# Altium PCB OmniChargePD.PcbDoc (part 2 of 2)
Units mm, origin at the board's own origin, x right, y up, seen from the top; angles counter-clockwise.
Board outline 77.8 x 67.8 mm, 4 copper layers (Top Layer, Signal Layer 1, Signal Layer 2, Bottom Layer), stack 0.778 mm thick; 111 components, 84 nets, 383 pads, 288 vias.
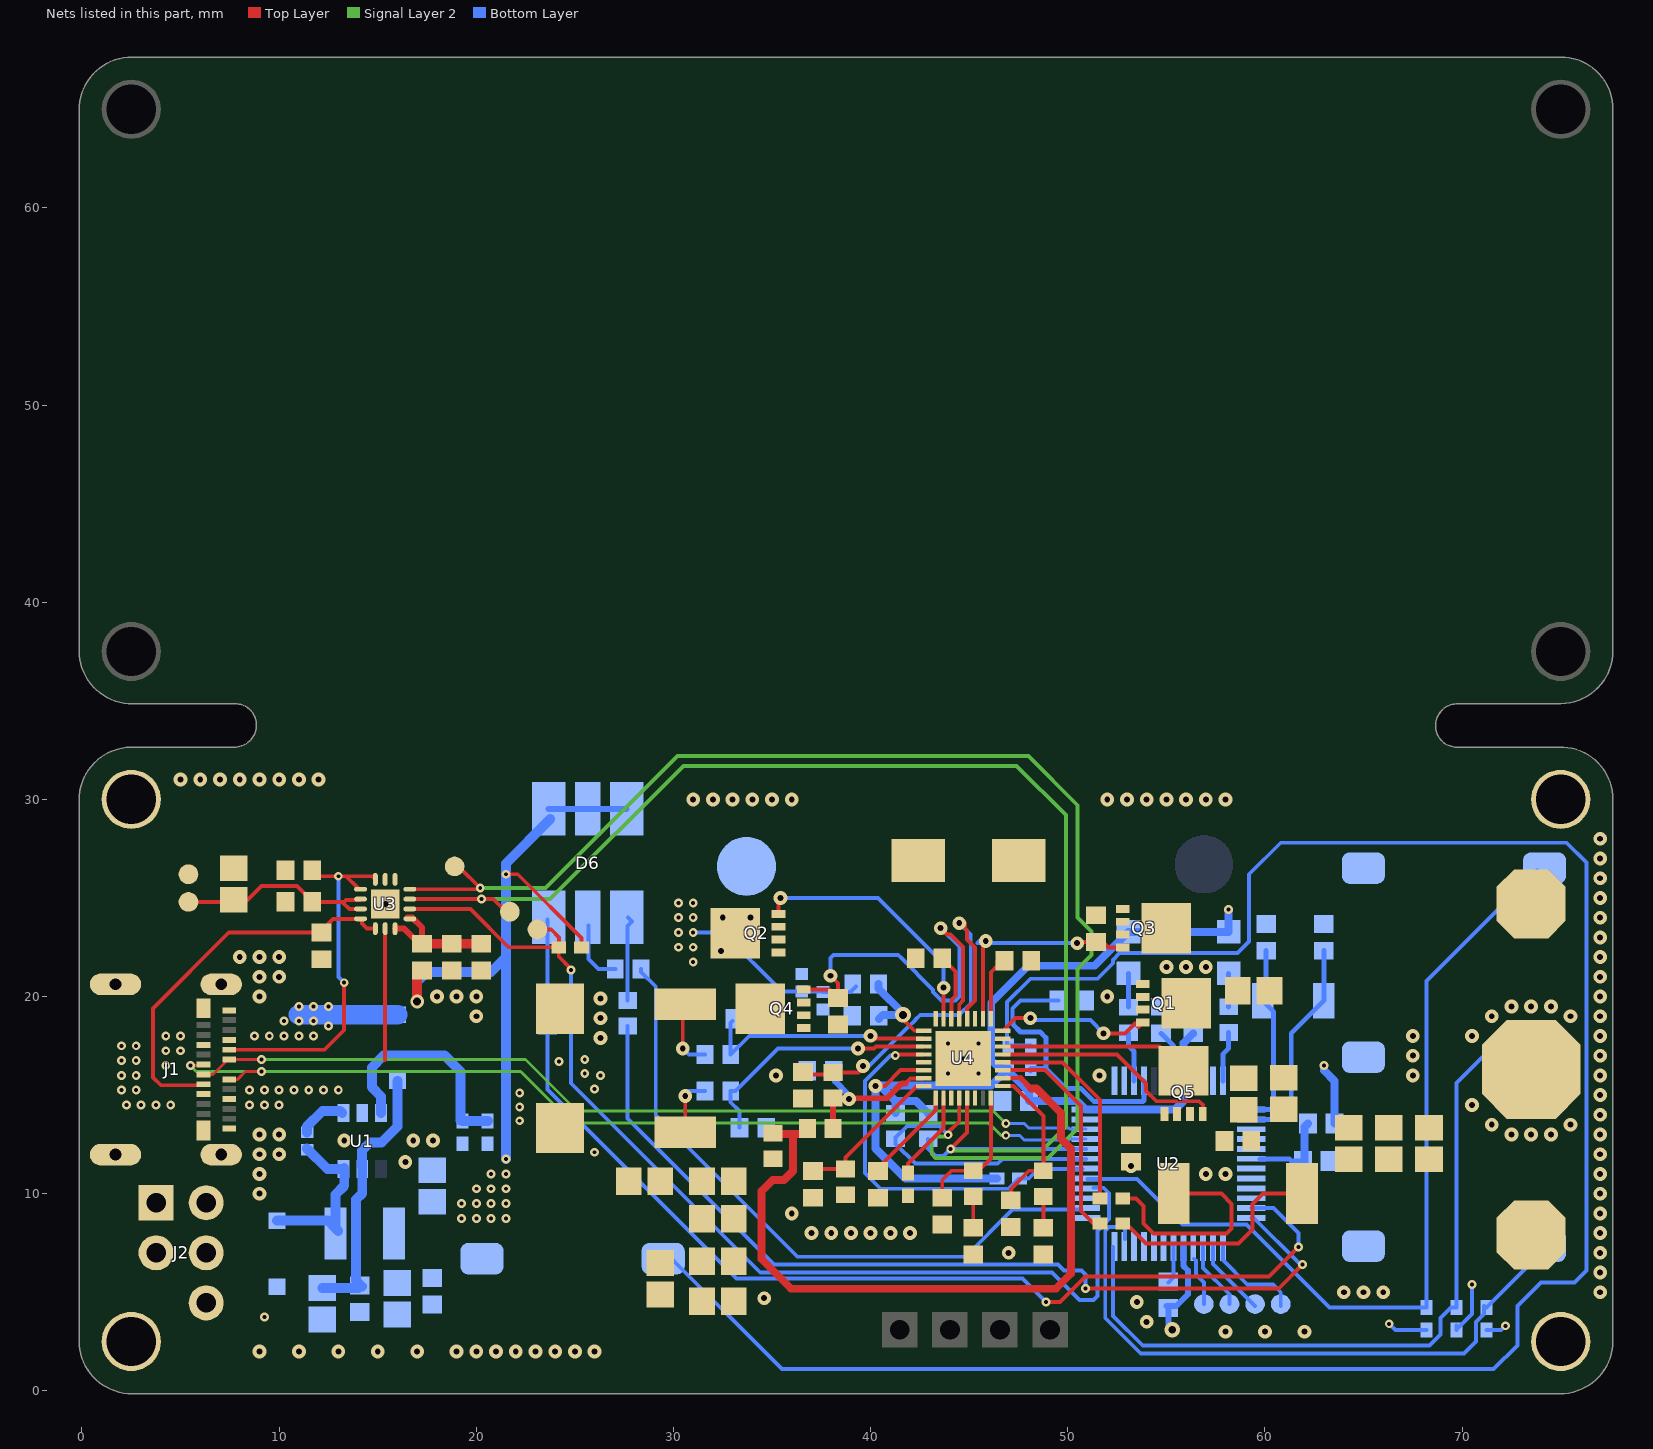
[diagram p4: the nets of this part, all layers, seen from the top]

## Via types
v1: diameter 0.45, hole 0.2, Top Layer to Bottom Layer, 138 vias
v2: diameter 0.7, hole 0.3, Top Layer to Bottom Layer, tented both sides, 123 vias
v3: diameter 0.7, hole 0.3, Top Layer to Bottom Layer, 19 vias
v4: diameter 0.45, hole 0.2, Top Layer to Bottom Layer, tented both sides, 5 vias
v5: diameter 0.8, hole 0.4, Top Layer to Bottom Layer, 2 vias
v6: diameter 0.7, hole 0.4, Top Layer to Bottom Layer, 1 vias

## Nets (pads, with @x,y where several pads share a name; then routed paths per layer and width w, separated by ;. In a path a pad name is that pad's centre, name@x,y a point inside that pad or via, vN(x,y) a via of type N, cw(c..) or ccw(c..) an arc to the next point about the centre after c; other vN are vias at no path point)
BATT: C44.1 C45.1 C46.2 C47.2 pad.@73.5,7.9 R21.1 R22.2 | length 11.3
  Top Layer w0.2: R22.2@52.787,8.481 52.95,8.481 53.966,7.465 58.666,7.465 59.377,8.176 59.377,9.487 59.895,10.005 R21.1@61.877,10.005
CHRG_OK: R7.2 U2.30 U4.4 | length 19.9
  Top Layer w0.2: v1(41.25,17) 41.313,17.063 U4.4@42.69,17.063
  Bottom Layer w0.2: v1(41.25,17) 41,17 39.711,15.711 39.711,11.039 40.5,10.25 47,10.25 R7.2@47.5,10.75 ; R7.2@47.556,10.77 48.02,10.77 48.5,11.25 U2.30@50.75,11.25
COMP1: C49.2 R25.2 U4.16 | length 6.9
  Top Layer w0.2: C49.2@43.632,9.791 43.632,10.695 44.1,11.163 R25.2@45.203,11.163 45.472,11.163 46.095,11.786 U4.16@46.095,14.858
COMP2: C50.2 R26.2 U4.17 | length 8.1
  Top Layer w0.2: U4.17@46.7,15.463 47.238,15.463 48.759,13.942 R26.2@48.759,11.163 48.032,11.163 47.108,10.239 C50.2@47.108,9.664
GND: C2.2 C3.1 C4.1 C5.2 C6.1 C7.1 C8.2 C9.2 C10.1 C11.1 C12.1 C13.1 C14.1 C15.1 C16.1 C17.1 C18.1 C19.1 C20.1 C22.2 C24.2 C25.2 C26.1 C27.1 C28.1 C29.1 C30.1 C31.1 C35.1 C36.1 C37.1 C38.1 C39.1 C40.1 C41.1 C42.1 C43.2 C45.2 C46.1 C47.1 C48.2 C49.1 C50.1 C51.1 C52.1 C53.1 C54.1 C55.1 D3.2 DN.1 J1.A1 J1.A12 J1.B1 J1.B12 J1.S1 J1.S2 J1.S3 J1.S4 J2.2 J2.4 J2.6 OK.1 pad.@2.5,2.5 pad.@2.5,30 pad.@5.4,26.2 pad.@33.7,26.6 pad.@73.5,16.3 pad.@75,2.5 pad.@75,30 Q3.1 Q3.2 Q3.3 Q4.1 Q4.2 Q4.3 R2.1 R27.1 R28.1 R29.1 RESET.1 U1.2 U2.5 U2.18 U2.35 U2.42 U3.8 U3.9 U3.15 U4.5 U4.14 U4.27 U4.33 UP.1 | length 1.9
  Bottom Layer w0.2: C13.1@55.1,5.5 55.363,5.763 U2.18@55.363,7.32
  other v2: 9,2 11,2 13,2 15,2 17,2 19,2 20,2 21,2 22,2 23,2 24,2 25,2 26,2 58,3 60,3 62,3 54,3.5 53.5,4.5 34.6,4.7 64,5 65,5 66,5 77,5 77,6 47,7 77,7 37,8 38,8 39,8 40,8 41,8 42,8 77,8 36,9 77,9 9,10 77,10 9,11 57,11 58,11 77,11 53.2,11.4 16.4,11.6 9,12 10,12 77,12 13.3,12.7 16.8,12.7 17.8,12.7 9,13 10,13 72.5,13 73.5,13 74.5,13 77,13 71.5,13.5 75.5,13.5 77,14 70.5,14.5 77,15 35.2,16 51.6,16 67.5,16 77,16 67.5,17 77,17 26.3,17.9 67.5,18 70.5,18 77,18 26.3,18.9 20,19 71.5,19 75.5,19 77,19 72.5,19.5 73.5,19.5 74.5,19.5 26.3,19.9 9,20 18,20 19,20 20,20 52,20 77,20 9,21 10,21 77,21 55,21.5 56,21.5 57,21.5 8,22 9,22 10,22 77,22 77,23 77,24 15.4,24.7 77,25 77,26 77,27 77,28 31,30 32,30 33,30 34,30 35,30 36,30 52,30 53,30 54,30 55,30 56,30 57,30 58,30 5,31 6,31 7,31 8,31 9,31 10,31 11,31 12,31
  other v4: 43.933,16.101 45.472,16.101 44.695,16.863 43.933,17.625 45.472,17.625
MISO_PD_INT: R30.1 TP3.1 U2.28 U3.5 | length 54.9
  Top Layer w0.2: U3.5@16.628,24.442 19.7,24.442 21.642,22.5 R30.1@24,22.5 ; TP3.1@23.1,23.4 23.8,23.4 24.2,23 R30.1@24.2,22.4 ; R30.1@24.181,22.492 24.181,22.019 24.8,21.4 v1(24.8,21.344)
  Bottom Layer w0.2: v1(24.8,21.344) 24.8,15.6 34.4,6 49.2,6 50.6,4.6 51.3,4.6 51.5,4.8 51.5,8.109 52.1,8.709 52.1,10 51.8,10.3 U2.28@51.3,10.3
MOSI: U2.25
NetC8_1: C8.1 U2.1 Y1.P$1 | length 9.4
  Bottom Layer w0.25: U2.1@59.313,14.27 60.263,14.27 60.443,14.45 60.443,19.224 Y1.P$1@59.883,19.784 60.062,19.963 C8.1@60.062,22.324
NetC9_1: C9.1 U2.2 Y1.P$2 | length 10.9
  Bottom Layer w0.25: U2.2@59.313,13.77 60.779,13.77 61.332,14.323 61.332,18.133 Y1.P$2@62.983,19.784 C9.1@62.983,22.324
NetC10_2: C10.2 U2.43 | length 2.7
  Bottom Layer w0.25: C10.2@54.728,18.133 55.363,17.498 U2.43@55.363,15.72
NetC14_2: C14.2 C15.2 FB2.2 U3.3 U3.4 | length 6.3
  Top Layer w0.3: U3.3@15.878,23.442 16.342,23.442 17.084,22.7 FB2.2@17.1,22.7 ; U3.4@16.5,24 16.75,24 17.25,23.5 FB2.2@17.25,22.675
  Top Layer w0.5: FB2.2@17.25,22.675 C15.2@18.75,22.675 C14.2@20.25,22.675
NetC20_2: C20.2 FB1.2 U2.6 | length 4.4
  Bottom Layer w0.25: U2.6@59.75,11.75 61.25,11.75 61.344,11.656 C20.2@61.927,11.656
  Bottom Layer w0.4: C20.2@62,11.5 62,13.38 FB1.2@62.181,13.561
NetC33_1: C33.1 U4.30 | length 3.4
  Top Layer w0.2: C33.1@43.632,21.943 44.314,21.261 44.314,20.038 44.095,19.819 U4.30@44.095,18.868
NetC33_2: C33.2 L2.1 Q2.1 Q2.2 Q2.3 Q4.5 U4.32
NetC34_1: C34.1 U4.25 | length 3.1
  Top Layer w0.2: U4.25@46.095,18.868 46.095,21.232 46.433,21.57 C34.1@46.433,21.816
NetC34_2: C34.2 L2.2 Q1.1 Q1.2 Q1.3 Q3.5 U4.23
NetC35_2: C35.2 Q4.4 U4.29 | length 20.9
  Top Layer w0.2: Q4.4@36.603,20.35 37.922,20.35 C35.2@38.345,19.927 38.345,20.673 v3(37.964,21.054) ; v3(43.552,23.467) 43.877,23.142 44.06,23.142 44.695,22.507 44.695,19.804 44.495,19.604 U4.29@44.495,18.868
  Bottom Layer w0.2: v3(37.964,21.054) 37.964,21.943 38.121,22.1 41.4,22.1 41.4,22.114 41.557,21.957 41.557,21.943 43.165,20.335 43.165,20.225 43.591,19.799 44.314,19.799 44.495,19.98 44.495,22.524 v3(43.552,23.467)
NetC36_2: C36.2 Q3.4 U4.26 | length 12
  Top Layer w0.2: U4.26@45.695,18.868 45.695,22.677 v3(45.838,22.82) ; v3(50.475,22.705) 50.537,22.767 C36.2@51.426,22.767 51.786,22.767 52.061,22.492 Q3.4@52.787,22.492
  Bottom Layer w0.2: v3(45.838,22.82) 45.525,22.82 45.41,22.705 v3(50.475,22.705)
NetC37_2: C37.2 C44.2 Q5.1 Q5.2 Q5.3 R20.2 R21.2 | length 11.3
  Top Layer w0.2: R20.2@52.787,9.751 53.458,9.751 53.839,9.37 53.839,8.481 54.347,7.973 58.051,7.973 58.305,8.227 58.305,9.487 57.787,10.005 R21.2@55.377,10.005
NetC38_2: C38.2 R17.1 U4.3 | length 12.8
  Top Layer w0.2: v3(39.361,17.371) 40.177,17.371 40.269,17.463 U4.3@42.69,17.463
  Bottom Layer w0.2: C38.2@33.352,13.345 33.352,14.183 32.899,14.636 R17.1@32.899,15.212 33.138,15.212 35.297,17.371 v3(39.361,17.371)
NetC39_2: C39.2 R18.1 U4.2 | length 12
  Top Layer w0.2: v3(39.996,18.006) 40.139,17.863 U4.2@42.69,17.863
  Bottom Layer w0.2: C39.2@33,18.75 32.899,18.649 R18.1@32.899,17.063 33.842,18.006 v3(39.996,18.006)
NetC43_1: C43.1 R19.2 U4.1 | length 5.2
  Top Layer w0.2: v5(41.647,19.07) 41.41,19.07 42.217,18.263 U4.1@42.69,18.263
  Bottom Layer w0.4: R19.2@40.392,20.632 40.392,20.404 41.647,19.149 v5(41.647,19.07) 40.619,19.07 C43.1@40.417,18.868
NetC51_2: C51.2 R24.1 U4.28 | length 19.9
  Top Layer w0.2: C51.2@36.567,16.177 36.701,16.043 R24.1@38.091,16.043 ; R24.1@38.091,16.152 39.379,16.152 39.615,16.388 v3(39.615,16.482) ; v3(44.495,23.721) 44.797,23.721 44.797,23.442 44.895,23.344 44.895,22.886 45.295,22.486 45.295,19.789 44.895,19.389 U4.28@44.895,18.868
  Bottom Layer w0.2: v3(39.615,16.482) 39.927,16.482 41.888,18.443 41.907,18.443 42.274,18.81 42.274,18.829 42.515,19.07 44.489,19.07 45.076,19.657 45.076,23.14 v3(44.495,23.721)
NetC52_2: C52.2 R25.1 | length 1.6
  Top Layer w0.2: C52.2@45.203,8.267 R25.1@45.203,9.863
NetC53_2: C53.2 R26.1 | length 1.6
  Top Layer w0.2: C53.2@48.759,8.267 R26.1@48.759,9.863
NetC54_2: C54.2 R28.2 U4.8 | length 7.7
  Top Layer w0.2: C54.2@37.075,11.148 37.177,11.25 R28.2@38.726,11.25 38.726,11.842 42.347,15.463 U4.8@42.69,15.463
NetC55_2: C55.2 U4.9 | length 4.9
  Top Layer w0.2: C55.2@40.377,11.148 40.377,11.295 43.295,14.213 U4.9@43.295,14.858
NetD4_2: D4.2 R5.1 | length 1.7
  Bottom Layer w0.25: R5.1@58.157,19.479 D4.2@58.157,21.181
NetD5_2: D5.2 R6.1 | length 1.7
  Bottom Layer w0.25: R6.1@53.077,19.46 D5.2@53.077,21.181
NetD6_1: D6.1 R10.1 | length 4.4
  Bottom Layer w0.2: R10.1@27.677,19.799 27.677,23.577 27.9,23.8 D6.1@27.7,24
NetD6_2: D6.2 R9.1 | length 3.3
  Bottom Layer w0.2: D6.2@25.7,23.6 25.7,21.9 26.2,21.4 R9.1@27.05,21.4
NetD6_3: D6.3 R8.1 | length 4.1
  Bottom Layer w0.2: D6.3@23.6,23.9 23.613,23.887 R8.1@23.613,19.799
NetJ3_2: R3.2 R4.2 RESET.2 | length 111
  Bottom Layer w0.2: RESET.2@30,6.6 35.5,1.1 71.6,1.1 72.8,2.3 72.8,4.3 74,5.5 75.7,5.5 76.3,6.1 76.3,26.8 75.3,27.8 60.8,27.8 59.2,26.2 59.2,22.8 58.6,22.2 52.629,22.2 52.288,21.859 52.288,21.688 51.5,20.9 48.1,20.9 46.911,19.711 46.911,17.575 R4.2@46.981,17.505 ; R4.2@47.1,17.5 47.105,17.505 R3.2@48.124,17.505
NetQ1_4: Q1.4 U4.24 | length 8.1
  Top Layer w0.2: U4.24@46.7,18.263 47.337,18.9 v3(48.1,18.9) ; v3(51.807,18.133) 52.9,18.133 53.408,18.641 53.585,18.464 Q1.4@53.803,18.682
  Bottom Layer w0.2: v3(48.1,18.9) 48.1,18.856 48.156,18.8 51.14,18.8 v3(51.807,18.133)
NetQ2_4: Q2.4 U4.31 | length 13.3
  Top Layer w0.2: Q2.4@35.323,24.188 35.323,24.89 v3(35.424,24.991) ; U4.31@43.695,18.868 43.695,19.665 43.704,19.657 v3(43.704,20.448)
  Bottom Layer w0.2: v3(35.424,24.991) 40.377,24.991 43.704,21.664 v3(43.704,20.448)
NetQ5_4: Q5.4 U4.21 | length 11.9
  Top Layer w0.2: U4.21@46.7,17.063 52.496,17.063 53.966,15.593 53.966,15.212 54.49,14.688 56.649,14.688 56.846,14.491 Q5.4@56.846,14.043
NetR23_1: R23.1 R27.2 U4.18 | length 37.9
  Top Layer w0.2: U4.18@46.7,15.863 47.6,15.863
  Top Layer w0.3: 47.6,15.863 48.124,15.339
  Top Layer w0.4: R27.2@35.043,13.068 35.076,13.035 36.059,13.035 ; R23.1@36.791,13.307 36.519,13.035 36.059,13.035 ; 48.124,15.339 48.414,15.339 49.648,14.105 49.648,12.799 50.156,12.291 50.156,5.941 49.394,5.179 35.97,5.179 34.472,6.677 34.472,10.132 35.034,10.695 35.606,10.695 36.059,11.148 36.059,13.035
NetR29_2: R29.2 U4.10 | length 4.6
  Top Layer w0.2: R29.2@41.901,11.048 41.901,11.54 43.695,13.334 U4.10@43.695,14.858
P\R\O\C\H\O\T\: U4.11
PA02: U2.3
PA03: U2.4
PA04: U2.9
PA05: U2.10
PA06: R8.2 U2.11 | length 50.5
  Top Layer w0.2: v1(48.9,4.5) 49.6,4.5 50.9,5.8 60.2,5.8 v1(61.7,7.3)
  Bottom Layer w0.2: R8.2@23.613,18.499 23.613,15.287 33.2,5.7 47.7,5.7 v1(48.9,4.5) ; U2.11@59.313,9.27 60.43,9.27 61.7,8 v1(61.7,7.3)
PA07: R10.2 U2.12 | length 46.9
  Top Layer w0.2: v1(50.9,5.2) 60.7,5.2 v1(61.9,6.4)
  Bottom Layer w0.2: R10.2@27.677,18.499 27.677,13.823 35.1,6.4 49.5,6.4 49.8,6.1 50.7,6.1 50.9,5.9 v1(50.9,5.2) ; U2.12@59.313,8.77 59.43,8.77 61.8,6.4 v1(61.9,6.4)
PA12: U2.21
PA13: U2.22
PA14: R13.2 U2.23 UP.2 | length 32
  Bottom Layer w0.2: U2.23@52.9,7.7 52.9,8.2 52.8,8.3 52.1,8.3 51.9,8.1 51.9,3.7 53.7,1.9 70.1,1.9 70.7,2.5 70.7,3.491 71.1,3.891 R13.2@71.1,4.3 ; R13.2@71.238,4.23 74.2,7.192 UP.2@74.2,7.2
PA15: OK.2 R14.2 U2.24 | length 39
  Bottom Layer w0.2: U2.24@52.3,7.3 52.3,3.8 53.8,2.3 68.352,2.3 68.9,2.848 68.9,3.7 69.43,4.23 R14.2@69.714,4.23 69.714,15.614 71,16.9 73.7,16.9 OK.2@73.9,16.7
PA20: DN.2 R15.2 U2.29 | length 44.4
  Bottom Layer w0.2: U2.29@51,10.75 53.5,10.75 55.819,8.431 59.069,8.431 63.27,4.23 R15.2@68.19,4.23 68.19,20.79 DN.2@73.8,26.4
PA27: R6.2 U2.39 | length 2.6
  Bottom Layer w0.25: R6.2@53.077,18.16 53.077,17.498 53.363,17.212 U2.39@53.363,15.72
PB02: U2.47
PB03: R5.2 U2.48 | length 2.6
  Bottom Layer w0.25: U2.48@57.863,15.72 57.863,17.077 58.157,17.371 R5.2@58.157,18.179
PB08: U2.7
PB09: U2.8
PB10: U2.19
PB11: U2.20
PB22: U2.37
PB23: U2.38
RESET: C7.2 R3.1 U2.40 | length 14.6
  Bottom Layer w0.2: 47.2,18.7 47.2,19.4 47.6,19.8 C7.2@49.525,19.8 ; R3.1@48.1,16.2 R3.1@48.255,16.355
  Bottom Layer w0.25: 47.225,18.8 47.225,18.575 47.6,18.2 48.6,18.2 48.886,17.914 48.886,16.355 ; R3.1@48.124,16.355 48.255,16.355 48.886,16.355 ; U2.40@53.863,15.72 53.863,14.728 53.819,14.684 51.319,14.684 50.664,15.339 49.902,15.339 48.886,16.355
SCL: R11.1 TP2.1 U2.32 U3.6 U4.13 | length 72.6
  Top Layer w0.2: U3.6@16.628,24.942 v1(20.258,24.942) 20.858,24.942 TP2.1@21.6,24.2 ; v1(44.06,12.27) 44.895,13.105 U4.13@44.895,14.858
  Signal Layer 2 w0.2: v1(20.258,24.942) 23.742,24.942 30.5,31.7 47.4,31.7 49.9,29.2 49.9,13.4 48.7,12.2 v1@44.1,12.2
  Bottom Layer w0.2: R11.1@42.917,12.782 42.917,12.291 43.298,11.91 43.7,11.91 v1(44.06,12.27) U2.32@50.913,12.27
SDA: R12.1 TP1.1 U2.31 U3.7 U4.12 | length 81.8
  Top Layer w0.2: U3.7@16.628,25.442 20.058,25.442 20.116,25.5 v1(20.2,25.5) ; TP1.1@18.9,26.6 19.1,26.6 v1(20.2,25.5) ; v1(43.933,12.987) 43.877,13.043 44.495,13.661 U4.12@44.495,14.858
  Signal Layer 2 w0.2: v1(20.2,25.5) 21.385,25.5 23.5,25.5 30.2,32.2 48,32.2 50.5,29.7 50.5,24 51.2,23.3 51.2,22.1 50.5,21.4 50.5,13.3 49,11.8 43.3,11.8 43.1,12 43.1,12.7 43.3,12.9 v1@43.8,12.9
  Bottom Layer w0.2: v1(43.933,12.987) 43.486,13.434 41.855,13.434 41.266,12.845 R12.1@41.266,12.784 41.266,12.53 42.267,11.529 46.446,11.529 46.687,11.77 U2.31@50.913,11.77
SPCK: R9.2 U2.26 | length 33.3
  Bottom Layer w0.2: R9.2@28.35,21.4 28.35,21.25 29.1,20.5 29.1,14 36.3,6.8 44.8,6.8 47.2,9.2 U2.26@50.7,9.2
SRN: R22.1 U4.19 | length 11.3
  Top Layer w0.2: U4.19@46.7,16.263 48.851,16.263 50.664,14.45 50.664,9.116 51.299,8.481 R22.1@51.637,8.481
SRP: R20.1 U4.20 | length 10.7
  Top Layer w0.2: U4.20@46.7,16.663 49.737,16.663 51.637,14.763 R20.1@51.637,9.751
SS: U2.27
UART_CTS: pad.@56.9,4.4 U2.16 | length 2.5
  Bottom Layer w0.2: U2.16@56.4,6.7 56.5,6.6 56.5,5.9 56.9,5.5 pad.@56.9,4.4
UART_FROM_MCU: pad.@60.8,4.4 U2.13 | length 5
  Bottom Layer w0.2: U2.13@57.863,7.32 57.863,6.637 59.1,5.4 60.4,5.4 60.8,5 pad.@60.8,4.4 pad.@60.8,4.3
UART_RTS: pad.@58.2,4.4 U2.15 | length 3.5
  Bottom Layer w0.2: U2.15@56.863,7.32 56.863,6.237 58.2,4.9 pad.@58.2,4.4
UART_TO_MCU: pad.@59.5,4.4 U2.14 | length 3.9
  Bottom Layer w0.2: U2.14@57.363,7.32 57.363,6.437 pad.@59.5,4.3
USB_N: J1.A7 J1.B7 U2.33 | length 49.5
  Top Layer w0.15: v1(5.5,16.5) 6.12,16.5 J1.B7@6.17,16.55 ; J1.A7@7.5,15.8 7.7,15.8 7.895,15.8 8.295,16.2 v1(9.1,16.2)
  Signal Layer 2 w0.15: v1(5.5,16.5) 5.8,16.2 v1(9.1,16.2) 9.4,16.2 22.251,16.2 24.855,13.596 45.97,13.596 46.605,12.961 v1(46.854,12.961)
  Bottom Layer w0.15: v1(46.854,12.961) 47.547,12.961 47.788,12.72 50.063,12.72 50.113,12.77 U2.33@50.913,12.77
USB_P: J1.A6 J1.B6 U2.34 | length 46.5
  Top Layer w0.15: J1.B6@6.17,16.05 6.65,16.05 7.4,16.8 J1.A6@7.47,16.8 v1(9.1,16.8)
  Signal Layer 2 w0.15: v1(9.1,16.8) 9.951,16.8 22.5,16.8 22.7,16.6 25.104,14.196 46.219,14.196 v1(46.854,13.561)
  Bottom Layer w0.15: v1(46.854,13.561) 47.796,13.561 48.037,13.32 50.063,13.32 50.113,13.27 U2.34@50.913,13.27
USBC_CC1: C18.2 J1.A5 U3.10 U3.11 | length 18.2
  Top Layer w0.2: J1.A5@7.47,17.3 12.3,17.3 13.3,18.3 v1(13.3,20.7) ; C18.2@11.7,26.2 11.8,26.1 v1(13,26.1) 13.4,26.1 ; U3.11@14,25.5 13.4,26.1 ; U3.10@14.8,26 14.7,26.1 13.4,26.1
  Bottom Layer w0.2: v1(13,26.1) 13,21 v1(13.3,20.7)
USBC_CC2: C19.2 J1.B5 U3.1 U3.14 | length 19.4
  Top Layer w0.2: J1.B5@6.2,15.6 6.1,15.5 4,15.5 3.6,15.9 3.6,19.4 7.445,23.245 C19.2@12.143,23.245 ; C19.2@12.3,23.5 12.742,23.942 U3.14@14.128,23.942 ; U3.14@14.2,23.9 14.2,23.7 14.458,23.442 U3.1@14.878,23.442
V3P3: C4.2 C5.1 C6.2 C11.2 C12.2 C13.2 D4.1 D5.1 D6.4 D6.5 D6.6 FB1.1 FB2.1 L1.2 R1.2 R4.1 R7.1 R11.2 R12.2 R13.1 R14.1 R15.1 R30.2 U2.17 U2.36 U2.44 U4.6 | length 105.6
  Top Layer w0.2: v1(21.5,26.2) 22.1,26.2 25.331,22.969 R30.2@25.331,22.492 ; v3(40.25,15.466) 40.72,15.466 41.517,16.263 U4.6@42.69,16.263
  Top Layer w0.5: v6(17,19.75) 17,21 FB2.1@17.25,21.25
  Bottom Layer w0.2: v1(66.3,3.4) 66.62,3.08 R15.1@68.19,3.08 ; R14.1@69.714,3.08 R14.1@69.714,3.114 ; R14.1@69.714,3.311 R14.1@69.714,3.114 ; v1(70.5,5.4) 70.5,3.9 R14.1@69.714,3.114 ; R13.1@71.238,3.08 71.98,3.08 v1(72.2,3.3)
  Bottom Layer w0.3: D6.4@23.67,29.519 D6.5@25.645,29.519 D6.6@27.62,29.519 ; C13.2@55,4.3 55.5,4.3 56.1,4.9 56.1,6.1 55.863,6.337 U2.17@55.863,7.32 ; C13.2@55.1,4.2 55.1,3.4 v5@55.3,3.2
  Bottom Layer w0.4: R12.2@41.266,14.084 41.266,14.704 ; R11.2@42.917,14.082 42.295,14.704 41.266,14.704 ; R7.1@46.406,10.77 41.771,10.77 40.25,12.291 v3(40.25,15.466) ; C11.2@56.363,18.133 55.863,17.633 U2.44@55.863,15.72 55.863,14.696 55.437,14.27 U2.36@50.913,14.27 50.479,14.704 C12.2@48.037,14.704 48.037,15.172 46.981,16.228 R4.1@46.981,16.355 ; v1(58.157,24.407) D4.1@58.157,23.281 D5.1@53.077,23.281 51.358,21.562 47.997,21.562 46.119,19.684 46.119,16.769 46.533,16.355 R4.1@46.981,16.355 ; v1(63,16.5) 63,16.25 63.531,15.719 FB1.1@63.531,13.561 ; v3(40.25,15.466) 40.277,15.493 46.119,15.493 R4.1@46.981,16.355 ; v3(40.25,15.466) 40.504,15.466 41.266,14.704
  Bottom Layer w0.5: v6(17,19.75) 17,20.75 17.5,21.25 20.75,21.25 21.5,22 ; v1(21.5,11.75) 21.5,22 ; D6.4@23.75,29 21.5,26.75 v1(21.5,26.2) 21.5,22
  other v1: 9.25,3.75 19.25,8.75 20,8.75 20.75,8.75 21.5,8.75 19.25,9.5 20,9.5 20.75,9.5 21.5,9.5 20,10.25 20.75,10.25 21.5,10.25 20.75,11 21.5,11
  other v5: 55.3,3.1
V3P3_FB: R1.1 R2.2 U1.3 | length 11.4
  Bottom Layer w0.5: U1.3@15.165,14.097 15.165,14.935 14.7,15.4 14.7,16.4 15.3,17 18.4,17 19.2,16.2 R2.2@19.2,13.7 ; R2.2@19.295,13.687 R1.1@20.565,13.687 20.587,13.687 R1.1@20.6,13.7
V3P3_LX: C1.1 U1.1 | length 2.5
  Bottom Layer w0.5: C1.1@11.421,13.112 11.421,13.421 12.2,14.2 13.1,14.2 U1.1@13.2,14.1
V3P3_PHASE: C1.2 D3.1 L1.1 U1.6 | length 8.9
  Bottom Layer w0.5: D3.1@9.897,8.632 12.468,8.632 L1.1@12.862,8.238 ; C1.2@11.4,12.3 12.453,11.247 U1.6@13.265,11.247 ; L1.1@13,8.1 L1.1@12.862,8.238 ; U1.6@13.3,11.3 13.3,10.4 12.862,9.962 L1.1@12.862,8.238
V3P3_VIN: C2.1 C3.2 D1.1 U1.5 | length 13.6
  Bottom Layer w0.5: C3.2@12.183,5.217 14.017,5.217 C2.1@14.1,5.3 ; C2.1@14.2,5.3 13.9,5.6 13.9,9.7 14.215,10.015 U1.5@14.215,11.247 ; U1.5@14.2,11.4 14.2,12.2 14.6,12.6 15.2,12.6 16,13.4 D1.1@16,15.725
VBUS: C25.1 C26.2 C27.2 C28.2 C40.2 C41.2 C42.2 D1.2 J1.A4 J1.A9 J1.B4 J1.B9 J2.1 J2.3 R16.1 R17.2 U3.2 | length 15
  Top Layer w0.2: 15.378,16.778 U3.2@15.378,23.442 ; R16.1@30.598,13.105 30.344,13.359 30.598,13.613 v3(30.598,14.958)
  Bottom Layer w0.2: v3(30.598,14.958) 30.543,14.958 30.507,14.994 30.725,15.212 R17.2@31.599,15.212
  Bottom Layer w1: 10.975,19.075 D1.2@16,19.075
  other v1: 26,12.1 22.2,13.7 22.2,14.4 2.25,14.5 3,14.5 3.75,14.5 4.5,14.5 8.5,14.5 9.25,14.5 10,14.5 22.2,15.1 2,15.25 2.75,15.25 8.5,15.25 9.25,15.25 10,15.25 10.75,15.25 11.5,15.25 12.25,15.25 13,15.25 26,15.3 2,16 2.75,16 26.3,16 25.5,16.1 4.25,16.5 24.2,16.7 2,16.75 2.75,16.75 25.5,16.8 4.25,17.25 5,17.25 2,17.5 2.75,17.5 4.25,18 5,18 8.75,18 9.5,18 10.25,18 11,18 11.75,18 12.5,18.5 10.25,18.75 11,18.75 11.75,18.75 11,19.5 11.75,19.5 12.5,19.5
VCC: C22.1 C24.1 Q2.5 R16.2 R18.2 R19.1 | length 13.1
  Top Layer w0.2: v3(30.471,17.371) 30.471,19.478 R16.2@30.598,19.605
  Bottom Layer w0.2: v3(30.471,17.371) 30.779,17.063 R18.2@31.599,17.063 ; v1(31,23.25) 32.5,23.25 35.5,20.25 C22.1@37.5,20.25 ; C22.1@37.583,20.224 38.974,20.224 R19.1@39.25,20.5
  other v1: 31,21.75 30.25,22.5 31,22.5 30.25,23.25 30.25,24 31,24 30.25,24.75 31,24.75
  other v3: 32.4,22.3 32.5,24 33.9,24
VCONN_IN: C16.2 C17.2 pad.@5.4,24.8 U3.12 U3.13 | length 10.3
  Top Layer w0.2: pad.@5.4,24.8 7.5,24.8 C16.2@7.6,24.7 ; C16.2@7.7,24.9 8.4,24.9 9.1,25.6 10.9,25.6 11.7,24.8 13.3,24.8 ; U3.12@14.1,24.9 13.4,24.9 13.3,24.8 ; U3.13@14.128,24.442 13.558,24.442 13.3,24.7 13.3,24.8
VDDA: C48.1 R23.2 R24.2 U4.7 | length 8.1
  Top Layer w0.2: 41.774,15.593 42.028,15.847 42.674,15.847 U4.7@42.69,15.863
  Top Layer w0.3: R23.2@38.091,13.307 R24.2@38.091,14.852 38.104,14.839 40.829,14.839 41.584,15.593 41.774,15.593
  Bottom Layer w0.3: C48.1@38.2,16 38.2,15.7 38.9,15 v3(38.9,14.8)
VSYS: C29.2 C30.2 C31.2 pad.@73.5,24.7 Q1.5 Q5.5 U4.22 | length 9.7
  Top Layer w0.2: U4.22@46.7,17.463 54.646,17.463 Q5.5@55.871,16.238
pads on no net: J1.A2 J1.A3 J1.A8 J1.A10 J1.A11 J1.B2 J1.B3 J1.B8 J1.B10 J1.B11 J2.5 OLED.1 OLED.2 OLED.3 OLED.4 U1.4 U2.41 U2.45 U2.46 U4.15
copper on no net:
  other v1: 9.4,33.1 10,33.1 10.6,33.1 11.2,33.1 11.8,33.1 12.4,33.1 13,33.1 64.3,33.2 64.8,33.2 65.4,33.2 66,33.2 66.6,33.2 67.2,33.2 67.8,33.2 68.4,33.2 9.7,33.7 10.3,33.7 10.9,33.7 11.5,33.7 12.1,33.7 12.7,33.7 64.5,33.8 65.1,33.8 65.7,33.8 66.3,33.8 66.9,33.8 67.5,33.8 68.1,33.8 9.4,34.3 10,34.3 10.6,34.3 11.2,34.3 11.8,34.3 12.4,34.3 13,34.3 64.3,34.4 64.8,34.4 65.4,34.4 66,34.4 66.6,34.4 67.2,34.4 67.8,34.4 68.4,34.4

## Polygon pours and split planes (outlines as drawn)
GND on Top Layer "GND_L01_P031" (solid, remove dead copper, pour order 31): 0,2.54 0,29.96 cw(c2.54,29.96) 2.54,32.5 75,32.5 cw(c75,30) 77.5,30 77.5,2.54 cw(c74.96,2.54) 74.96,0 2.54,0 cw(c2.54,2.54)
NetC34_2 on Top Layer "NETC34_2_L01_P002" (solid, remove dead copper, pour order 2): 45.584,28.801 45.584,24.356 46.6,23.34 46.981,23.34 47.489,22.832 47.489,20.475 48.759,19.205 48.759,18.263 48.502,18.006 46.219,18.006 46.219,17.75 50.789,17.75 52.089,19.05 54.248,19.05 54.474,19.276 54.474,21.621 54.748,21.895 56.506,21.895 56.76,22.149 56.76,25.245 56.633,25.372 53.966,25.372 53.458,24.864 53.458,22.324 52.315,21.181 50.537,21.181 49.902,21.816 49.902,28.293 49.394,28.801
VBUS on Top Layer "VBUS_L01_P022" (solid, remove dead copper, pour order 22): 10.7,19.7 9.3,18.3 3.7,18.3 2.54,18.3 1.5,18.3 1.5,14.8 2.3,14 13.2,14 14,14.8 14,19.3 13.6,19.7
no net on Top Layer "NONET_L01_P033" (solid, pour order 33): 0,37.54 0,64.96 cw(c2.54,64.96) 2.54,67.5 75,67.5 cw(c75,65) 77.5,65 77.5,37.54 cw(c74.96,37.54) 74.96,35 2.54,35 cw(c2.54,37.54)
VSYS on Top Layer "VSYS_L01_P006" (solid, remove dead copper, pour order 6): 61.225,19.375 69.575,27.725 75,27.725 75.5,27.225 75.5,22.125 74.05,20.675 68.775,20.675 63.323,15.223 61.977,15.222 61.967,15.212 57.776,15.212 57.522,14.958 54.601,14.958 54.474,15.085 54.474,15.593 54.22,15.847 54.22,17.925 54.601,18.306 54.601,21.453 54.9,21.752 59.046,21.752 59.302,21.496 59.302,19.627 59.554,19.375
VBUS on Top Layer "VBUS_L01_P012" (solid, remove dead copper, pour order 12): 21.1,13 11.8,13 10.8,14 14,17.2 21.1,17.2 25.8,17.2 29.058,13.942 32.376,13.942 32.503,13.815 32.503,11.91 32.122,11.529 32.122,3.782 31.995,3.655 30.852,3.655 30.471,4.036 30.471,5.433 30.09,5.814 28.82,5.814 28.439,6.195 28.439,9.243 28.693,9.497 28.693,11.402 28.312,11.783 28.274,11.745 22.355,11.745
BATT on Top Layer "BATT_L01_P010" (solid, remove dead copper, pour order 10): 69.281,7.719 71.6,5.4 75.5,5.4 75.5,9.7 74.9,10.3 72.8,12.4 69.3,12.4 69.15,12.545 62.983,12.545 62.115,13.413 58.898,13.413 58.792,13.307 58.792,12.037 59.3,11.529 61.078,11.529 61.078,8.227 61.586,7.719
NetC37_2 on Top Layer "NETC37_2_L01_P008" (solid, remove dead copper, pour order 8): 53.37,14.45 52.572,13.652 52.572,12.454 52.735,12.291 54.093,12.291 54.538,11.846 54.538,8.435 54.618,8.354 56.125,8.354 56.196,8.425 56.196,11.54 56.401,11.745 58.246,11.745 58.538,12.037 58.538,13.18 58.284,13.434 56.76,13.434 56.379,13.815 56.379,14.323 56.252,14.45
VCC on Top Layer "VCC_L01_P004" (solid, remove dead copper, pour order 4): 28.884,25.308 27.931,24.356 27.931,18.734 32.376,18.734 32.63,18.988 32.63,20.8 33.646,21.816 34.408,21.816 34.535,21.943 34.535,25.308
NetC33_2 on Top Layer "NETC33_2_L01_P000" (solid, remove dead copper, pour order 0): 43.806,28.801 39.869,28.801 36.603,25.535 36.603,23.942 36.153,23.942 36.031,23.82 34.916,23.82 34.789,23.693 34.789,21.689 34.535,21.435 33.773,21.435 32.884,20.546 32.884,18.26 35.932,18.26 35.932,20.673 36.059,20.673 36.44,21.054 41.175,21.054 42.917,19.312 42.917,18.895 43.171,18.641 43.384,18.641 43.425,18.682 43.425,20.927 42.917,21.435 42.917,23.34 43.806,24.229
V3P3 on Signal Layer 2 "V3P3_L03_P014" (solid, remove dead copper, pour order 14): 21.783,13.75 9.705,13.75 7.865,11.91 7.865,3.782 8.881,2.766 66.539,2.766 67.428,1.877 72.254,1.877 73.651,3.274 73.651,22.578 70.603,25.626 56.506,25.626 51.68,20.8 51.68,13.307 48.505,10.132 25.518,10.132
VBUS on Signal Layer 2 "VBUS_L03_P024" (solid, remove dead copper, pour order 24): 2.2,18.8 9.3,18.8 10.6,20.1 15.2,20.1 16.1,19.2 24,19.2 27.9,15.3 27.9,10.9 27.6,10.6 25.2,10.6 21.9,13.9 9.3,13.9 8.5,13.1 1.9,13.1 1.3,13.7 1.3,17.9
BATT on Signal Layer 2 "BATT_L03_P016" (solid, remove dead copper, pour order 16): 37.456,6.703
GND on Bottom Layer "GND_L04_P027" (solid, remove dead copper, pour order 27): 0,2.54 0,29.96 cw(c2.54,29.96) 2.54,32.5 75,32.5 cw(c75,30) 77.5,30 77.5,2.54 cw(c74.96,2.54) 74.96,0 2.54,0 cw(c2.54,2.54)
no net on Bottom Layer "NONET_L04_P035" (solid, pour order 35): 0,37.54 0,64.96 cw(c2.54,64.96) 2.54,67.5 75,67.5 cw(c75,65) 77.5,65 77.5,37.54 cw(c74.96,37.54) 74.96,35 2.54,35 cw(c2.54,37.54)
VBUS on Bottom Layer "VBUS_L04_P026" (solid, remove dead copper, pour order 26): 1.3,18.1 1.3,13.9 2.5,12.7 3.2,12.7 3.3,12.6 3.3,11.2 2.4,10.3 2.4,6.6 3.2,5.8 4.3,5.8 5,6.5 5,12.6 6.3,13.9 10.5,13.9 11.5,14.9 13.5,14.9 13.5,19.6 12.9,20.2 9.4,20.2 7.8,18.6 1.8,18.6
V3P3 on Bottom Layer "V3P3_L04_P018" (solid, remove dead copper, pour order 18): 19.996,13.053 19.803,12.86 19.803,11.021 19.168,10.386 15.231,10.386 14.215,9.37 14.215,6.83 14.977,6.068 14.977,4.925 15.231,4.671 16.755,4.671 17.122,5.038 18.406,5.038 18.406,5.052 22.216,8.862 22.216,12.926 22.089,13.053
GND on Signal Layer 1 "GND_L02_P029" (solid, remove dead copper, pour order 29): 0,2.54 0,29.96 cw(c2.54,29.96) 2.54,32.5 75,32.5 cw(c75,30) 77.5,30 77.5,2.54 cw(c74.96,2.54) 74.96,0 2.54,0 cw(c2.54,2.54)

## Other copper
Top Layer:
  region: 46.7,17.063
Bottom Layer:
  region net NetC38_2: 32.899,15.212

## Silkscreen, mask and mechanical layers (free items; w line width, h text height)
Top Overlay:
  drawing of 1072 lines, arcs and shapes, not listed
  text "V SYS" at 70,58 h1 r90
  text "8A MAX" at 72,57.5 h1 r90
  text "GND" at 72,50 h1 r90
  text "PD IN" at 2,49 h1 r90
  text "5A MAX" at 4,48.5 h1 r90
  text "8A MAX" at 72,39.5 h1 r90
  text "BATTERY" at 70,39 h1 r90
  text "Supported PDO: 5V 3A, 9V 3A, 15V 3A, 20V 5A" at 20,38 h0.9
  text "Output: 3V -> 18V" at 31,36 h0.9
  text "VSYS" at 71.6,27.1 h0.9
  text "GND" at 72.2,20.7 h0.9
  text "BATT" at 71.8,10.4 h0.9
Bottom Overlay:
  lines w0.2: 51.5,23.5 51.5,21.5 52,21 52,17.75 52.5,17.25
Mechanical 13:
  lines w0.3: 2.4,35 7.77,35 cw(c7.77,33.77) 9,33.77 cw(c7.73,33.77) 7.73,32.5 2.5,32.5 ; 2.54,32.5 ccw(c2.54,29.96) 0,29.96 0,2.54 ccw(c2.54,2.54) 2.54,0 74.96,0 ccw(c74.96,2.54) 77.5,2.54 77.5,30 ccw(c75,30) 75,32.5 ; 2.54,35 cw(c2.54,37.54) 0,37.54 0,64.96 cw(c2.54,64.96) 2.54,67.5 75,67.5 cw(c75,65) 77.5,65 77.5,37.54 cw(c74.96,37.54) 74.96,35 ; 20,32.5 57.5,32.5 62.73,32.5 ccw(c62.73,33.77) 64,33.77 ccw(c62.77,33.77) 62.77,35 57.4,35 ; 20.1,32.5 14.73,32.5 cw(c14.73,33.73) 13.5,33.73 cw(c14.77,33.73) 14.77,35 20,35 57.5,35 ; 75,35 69.77,35 ccw(c69.77,33.73) 68.5,33.73 ccw(c69.73,33.73) 69.73,32.5 75.1,32.5